# Altium PCB SchemaPCB_vova.PcbDoc
Units mm, origin at the board's own origin, x right, y up, seen from the top; angles counter-clockwise.
Board outline 152.4 x 101.6 mm, 2 copper layers (Top Layer, Bottom Layer); 76 components, 81 nets, 386 pads, 0 vias.
Unrouted connection lines stored in the file: 195.
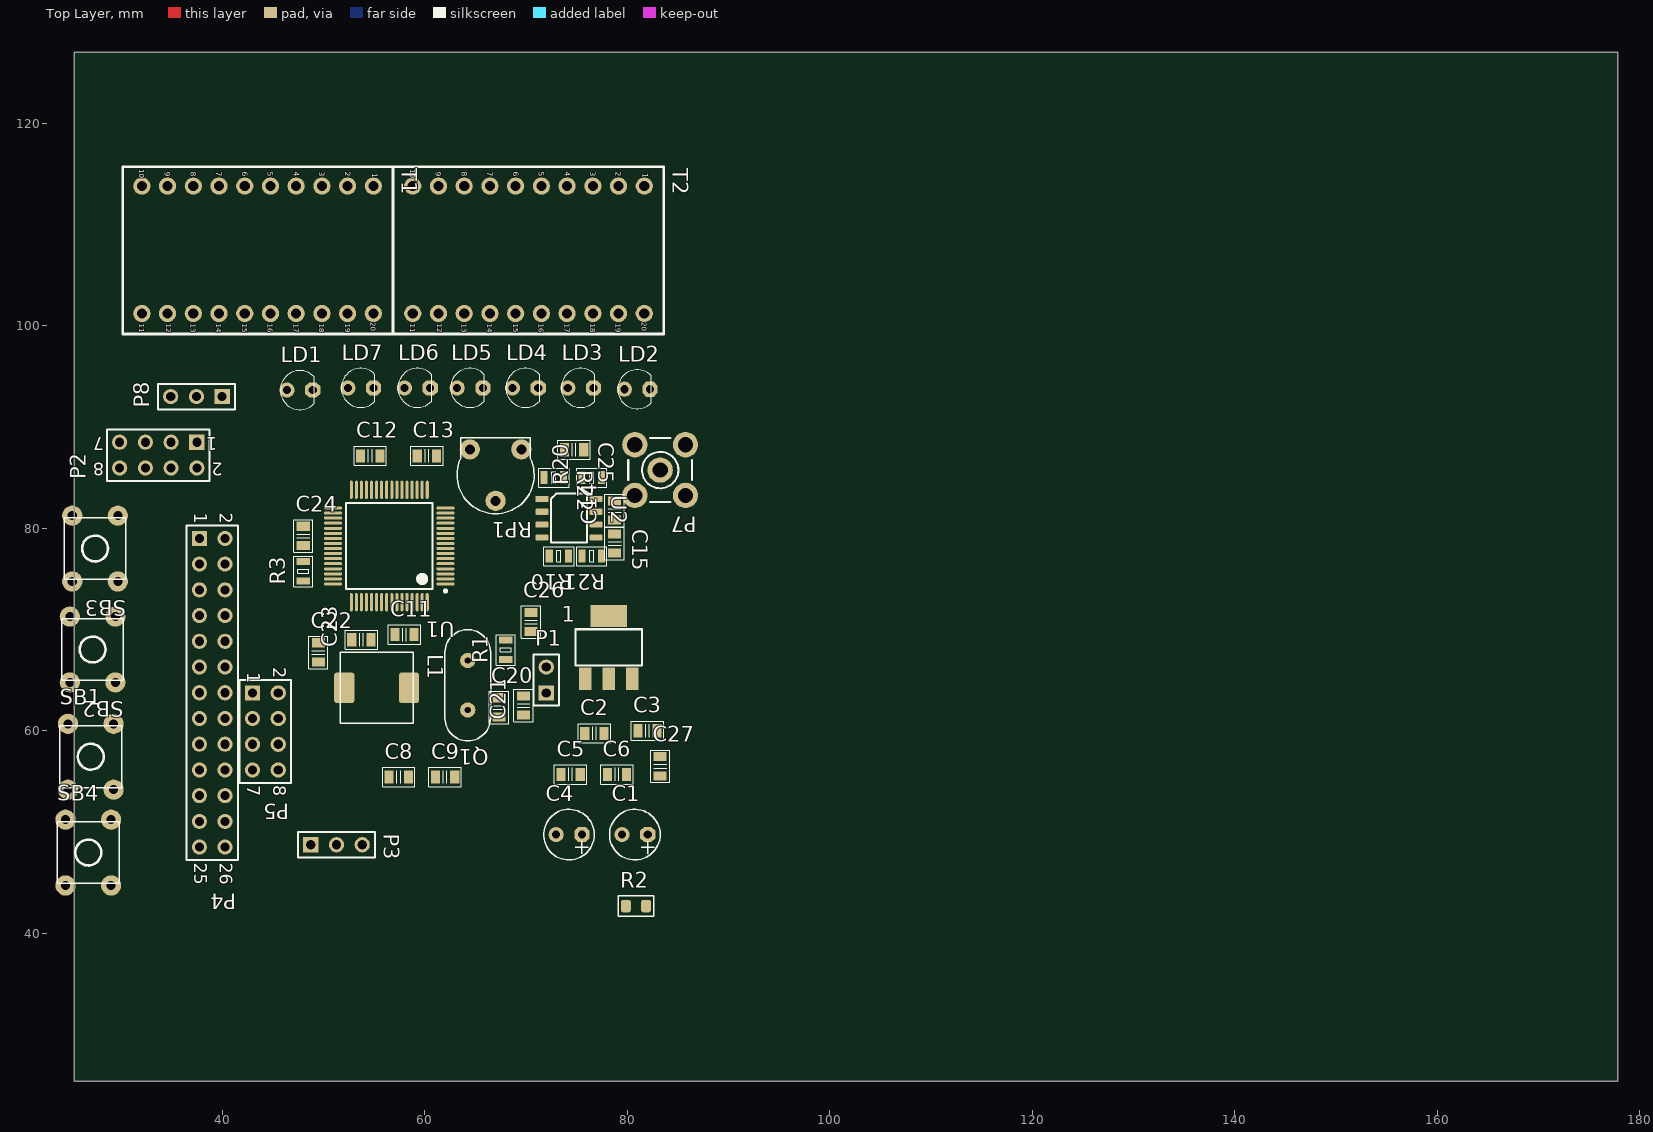
[diagram p0: Top Layer view]
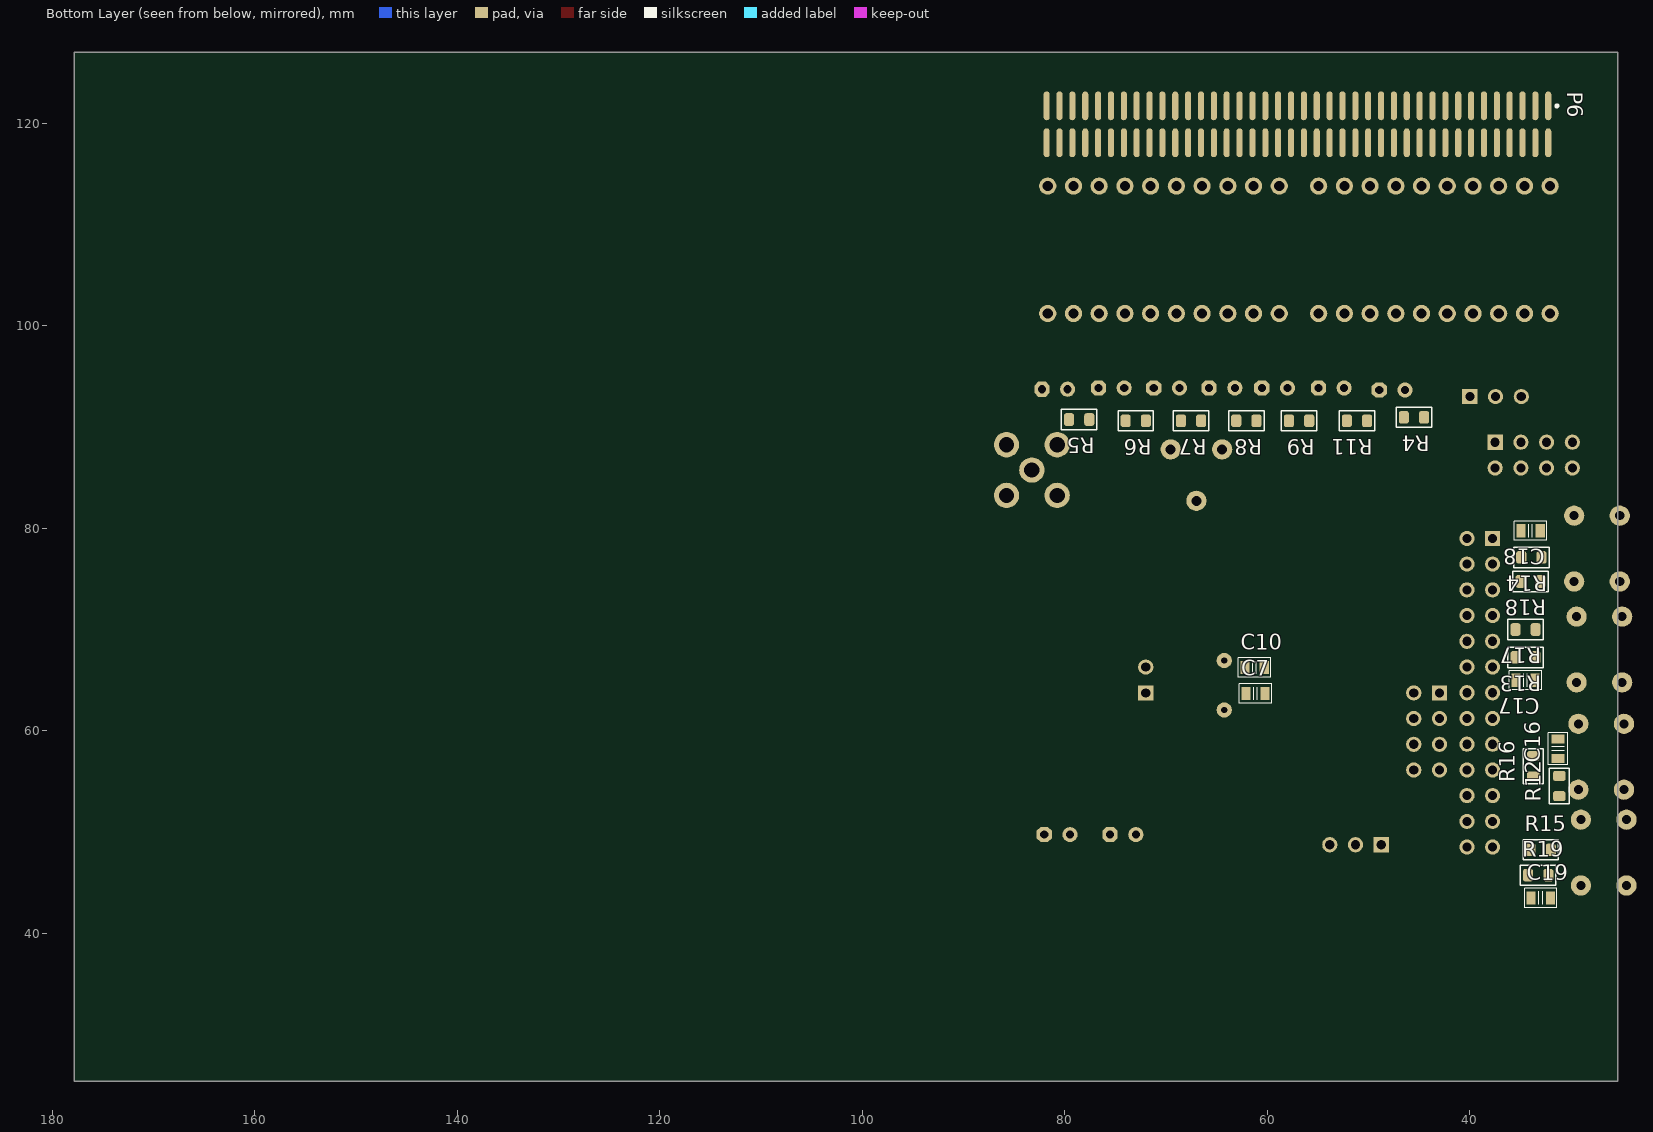
[diagram p1: Bottom Layer view, seen from below]

## Layer stack, top to bottom
Top Solder: solder mask 0.0102, Solder Resist, Dk 3.5
Top Layer: signal copper 0.0356
Dielectric 1: dielectric 0.32, FR-4, Dk 4.8
Bottom Layer: signal copper 0.0356
Bottom Solder: solder mask 0.0102, Solder Resist, Dk 3.5

## Board outline
25.4,25.4 177.8,25.4 177.8,127 25.4,127

## Design rules (kind name [scope] priority, off if disabled: settings)
Clearance [All] p1: gap=0.254
PolygonConnect [All] p1: connectstyle=Relief reliefconductorwidth=0.254 reliefentries=4 polygonreliefangle="90 Angle" airgapwidth=0.254
RoomDefinition Schema [InComponentClass('Schema')] p1: confinementstyle=ConfineIn formatcopy=TRUE lockcomponents=FALSE outline 178.856,25.36 651.804,25.36 651.804,79.843 178.856,79.843
RoutingVias [All] p1: holewidth=0.711 width=1.27 viastyle="Through Hole" minholewidth=0.711 minwidth=1.27 maxholewidth=0.711 maxwidth=1.27
SolderMaskExpansion [All] p1: expansion=0.102
Width [All] p1: maxlimit=0.254 minlimit=0.254 preferedwidth=0.254
29 further rules are at their usual default settings.

## Components (designator, comment, footprint, x,y, rotation, side; value= is the part's Value field where it differs from the comment)
1 "AMS1117-1.8" SOT-223_AMS1117-3.3(Primary) 78.25,68.25 r0 top
C1 "100u" El-d5-h11-F2.54 80.75,49.75 r0 top
C2 "100nF" C_0805 76.75,59.75 r0 top
C3 "100nF" C_0805 82,60 r0 top
C4 "100u" El-d5-h11-F2.54 74.25,49.75 r0 top
C5 "100nF" C_0805 74.409,55.699 r0 top
C6 "100nF" C_0805 78.981,55.699 r0 top
C7 "20pF" C_0805 61.165,63.69 r180 bottom
C8 "100nF" C_0805 57.441,55.44 r0 top
C9 "100nF" C_0805 62.013,55.44 r0 top
C10 "20pF" C_0805 61.25,66.25 r180 bottom
C11 "100nF" C_0805 58,69.5 r0 top
C12 "2.2uF" C_0805 54.623,87.151 r0 top
C13 "2.2uF" C_0805 60.211,87.151 r0 top
C14 "100nF" C_0805 78.75,81.75 r90 top
C15 "100nF" C_0805 78.75,78.5 r270 top
C16 "100nF" C_0805 31.297,58.233 r90 bottom
C17 "100nF" C_0805 34.5,65 r0 bottom
C18 "100nF" C_0805 34,79.75 r0 bottom
C19 "100nF" C_0805 33,43.5 r180 bottom
C20 "1uF" C_0805 67.342,62.321 r90 top
C21 "100nF" C_0805 69.75,62.5 r90 top
C22 "1uF" C_0805 49.5,67.75 r90 top
C23 "100nF" C_0805 53.75,69 r180 top
C24 "4.7uF" C_0805 48,79.25 r90 top
C25 "100nF" C_0805 74.75,87.75 r0 top
C26 "100nF" C_0805 70.5,70.75 r90 top
C27 "100nF" C_0805 83.25,56.5 r90 top
L1 "33u" Dr-SD-75 55.25,64.25 r270 top
LD1 "Led" "Led d3mm Blue" 47.673,93.646 r0 top
LD2 "Led" "Led d3mm Blue" 80.987,93.733 r0 top
LD3 "Led" "Led d3mm Blue" 75.399,93.86 r0 top
LD4 "Led" "Led d3mm Blue" 69.938,93.86 r0 top
LD5 "Led" "Led d3mm Blue" 64.477,93.86 r0 top
LD6 "Led" "Led d3mm Blue" 59.27,93.86 r0 top
LD7 "Led" "Led d3mm Blue" 53.682,93.86 r0 top
P1 "I2C2_ ControlWolf" HDR1X2 72,63.75 r90 top
P2 "HPower 4X2 5V,3V To DSP POWER" HDR2X4 37.5,88.5 r180 top
P3 "SWD" HDR1X3 48.75,48.75 r0 top
P4 "Header 13X2 ToWolf" HDR2X13 37.75,79 r270 top
P5 "Header 4X2 PogoWolf" HDR2X4 43,63.75 r270 top
P6 "1.27mm" 1.27mm-80p 57.023,119.888 r270 bottom
P7 "SMB" SMB_V-RJ45 83.25,85.75 r180 top
P8 "Header_GPIO_DSP" HDR1X3 40,93 r180 top
Q1 "8MHz" HC49S 64.25,64.5 r270 top
R1 "0" R_0805 68,68 r90 top
R2 "0k" R0805 80.859,42.693 r0 top
R3 "0" R_0805 48,75.75 r90 top
R4 "330" R0805 45.518,90.955 r0 bottom
R5 "330" R0805 78.578,90.741 r0 bottom
R6 "330" R0805 72.99,90.614 r0 bottom
R7 "330" R0805 67.529,90.614 r0 bottom
R8 "330" R0805 62.068,90.614 r0 bottom
R9 "330" R0805 56.861,90.614 r0 bottom
R10 "0" R_0805 73.25,77.25 r180 top
R11 "330" R0805 51.146,90.614 r0 bottom
R12 "30k" R0805 31.17,54.55 r90 bottom
R13 "30k" R0805 34.5,67.25 r0 bottom
R14 "30k" R0805 33.925,77.124 r0 bottom
R15 "30k" R0805 33,48.25 r180 bottom
R16 "100k" R0805 33.75,56.5 r90 bottom
R17 "100k" R0805 34.5,70 r0 bottom
R18 "100k" R0805 34,74.75 r0 bottom
R19 "100k" R0805 33.25,45.75 r180 bottom
R20 "0" R_0805 76.5,85 r180 top
R21 "0" R_0805 76.5,77.25 r180 top
R22 "0" R_0805 72.75,85 r0 top
RP1 "10k" "R-Tr 6LV" 67,85.25 r180 top
SB1 "TS-06" TS-06 27.029,57.443 r0 top
SB2 "TS-06" TS-06 27.209,68.03 r180 top
SB3 "TS-06" TS-06 27.451,77.997 r180 top
SB4 "TS-06" TS-06 26.783,47.981 r0 top
T1 "Logic Level Converter" TXS0108E 43.5,107.5 r270 top
T2 "Logic Level Converter" TXS0108E 70.25,107.5 r270 top
U1 "STM32F405RGT6" STM-LQFP64_N 56.5,78.25 r180 top
U2 "MCP6022" SO8-150 74.25,81 r270 top

## Footprints (in the part's own frame and the unit in brackets; to place one, negate y for a bottom-side part, rotate by r counter-clockwise, add the part's x,y. Pads: shape width x height; smd on the part's side, far side on the other; paste and mask are expansions set on the pad)
1.27mm-80p [mm] "80-Leads, Body 50,85x3,50mm, Pitch 1,27mm"
  oval 2.85x0.6 smd: 1(-1.825,24.765) 2(-1.825,23.495) 3(-1.825,22.225) 4(-1.825,20.955) 5(-1.825,19.685) 6(-1.825,18.415) 7(-1.825,17.145) 8(-1.825,15.875) 9(-1.825,14.605) 10(-1.825,13.335) 11(-1.825,12.065) 12(-1.825,10.795) 13(-1.825,9.525) 14(-1.825,8.255) 15(-1.825,6.985) 16(-1.825,5.715) 17(-1.825,4.445) 18(-1.825,3.175) 19(-1.825,1.905) 20(-1.825,0.635) 21(-1.825,-0.635) 22(-1.825,-1.905) 23(-1.825,-3.175) 24(-1.825,-4.445) 25(-1.825,-5.715) 26(-1.825,-6.985) 27(-1.825,-8.255) 28(-1.825,-9.525) 29(-1.825,-10.795) 30(-1.825,-12.065) 31(-1.825,-13.335) 32(-1.825,-14.605) 33(-1.825,-15.875) 34(-1.825,-17.145) 35(-1.825,-18.415) 36(-1.825,-19.685) 37(-1.825,-20.955) 38(-1.825,-22.225) 39(-1.825,-23.495) 40(-1.825,-24.765) 41(1.825,-24.765) 42(1.825,-23.495) 43(1.825,-22.225) 44(1.825,-20.955) 45(1.825,-19.685) 46(1.825,-18.415) 47(1.825,-17.145) 48(1.825,-15.875) 49(1.825,-14.605) 50(1.825,-13.335) 51(1.825,-12.065) 52(1.825,-10.795) 53(1.825,-9.525) 54(1.825,-8.255) 55(1.825,-6.985) 56(1.825,-5.715) 57(1.825,-4.445) 58(1.825,-3.175) 59(1.825,-1.905) 60(1.825,-0.635) 61(1.825,0.635) 62(1.825,1.905) 63(1.825,3.175) 64(1.825,4.445) 65(1.825,5.715) 66(1.825,6.985) 67(1.825,8.255) 68(1.825,9.525) 69(1.825,10.795) 70(1.825,12.065) 71(1.825,13.335) 72(1.825,14.605) 73(1.825,15.875) 74(1.825,17.145) 75(1.825,18.415) 76(1.825,19.685) 77(1.825,20.955) 78(1.825,22.225) 79(1.825,23.495) 80(1.825,24.765)
  silkscreen extent -1.95,25.49 -1.7,25.74, body extent -1.04,-25.7 2.56,25.2, height 6
C_0805 [mm] "Capacitor Pattern"
  rect 0.9x1.3 smd: 1(-0.95,0) 2(0.95,0)
  silkscreen extent -1.6,-0.95 1.6,0.95, body extent -1,-0.63 1,0.62, height 0.6
Dr-SD-75 [mm] "7.3x7.3x5mm"
  rrect25% 3x2 smd: 1(0,-3.2) 2(0,3.2)
  silkscreen extent -3.5,-3.6 3.5,3.6, body extent -3.5,-3.6 3.5,3.6, height 4.51
El-d5-h11-F2.54 [mm]
  oct 1.5x1.5 hole 0.8: 1(1.27,0)
  round 1.5 hole 0.8: 2(-1.27,0)
  silkscreen extent -2.5,-2.5 2.5,2.5, body extent -2.5,-2.5 2.55,2.55, height 11.53
HC49S [mm]
  round 1.5 hole 0.6: 1(-2.44,0) 2(2.44,0)
  silkscreen extent -5.5,-2.25 5.5,2.25, body extent -5.5,-2.25 5.5,2.25, height 3.7
HDR1X2 [mm] "Connector; Header; 2 Position"
  rect 1.5x1.5 hole 0.9: 1(0,0)
  round 1.5 hole 0.9: 2(2.54,0)
  silkscreen extent -1.27,-1.27 3.81,1.27
HDR1X3 [mm] "Connector; Header; 3 Position"
  rect 1.5x1.5 hole 0.9: 1(0,0)
  round 1.5 hole 0.9: 2(2.54,0) 3(5.08,0)
  silkscreen extent -1.27,-1.27 6.35,1.27
HDR2X4 [mm] "Connector; Header; 4x2 Position"
  rect 1.5x1.5 hole 0.9: 1(0,0)
  round 1.5 hole 0.9: 2(0,2.54) 3(2.54,0) 4(2.54,2.54) 5(5.08,0) 6(5.08,2.54) 7(7.62,0) 8(7.62,2.54)
  silkscreen extent -1.27,-1.27 8.89,3.81
HDR2X13 [mm] "Connector; Header; 13x2 Position"
  rect 1.5x1.5 hole 0.9: 1(0,0)
  round 1.5 hole 0.9: 2(0,2.54) 3(2.54,0) 4(2.54,2.54) 5(5.08,0) 6(5.08,2.54) 7(7.62,0) 8(7.62,2.54) 9(10.16,0) 10(10.16,2.54) 11(12.7,0) 12(12.7,2.54) 13(15.24,0) 14(15.24,2.54) 15(17.78,0) 16(17.78,2.54) 17(20.32,0) 18(20.32,2.54) 19(22.86,0) 20(22.86,2.54) 21(25.4,0) 22(25.4,2.54) 23(27.94,0) 24(27.94,2.54) 25(30.48,0) 26(30.48,2.54)
  silkscreen extent -1.27,-1.27 31.75,3.81
"Led d3mm Blue" [mm]
  round 1.5 hole 0.8: 1(-1.27,0)
  oct 1.5x1.5 hole 0.8: 2(1.27,0)
  silkscreen extent -1.92,-1.92 1.4,1.92, body extent -1.57,-1.55 1.57,1.55, height 7.36
R0805 [mm]
  rrect50% 1x1.25 smd: 1(-1,0) 2(1,0)
  silkscreen extent -1.75,-1 1.75,1, body extent -1,-0.62 1,0.63, height 0.6
"R-Tr 6LV" [mm]
  round 2 hole 1: 1(-2.54,-2.54) 2(0,2.54) 3(2.54,-2.54)
  silkscreen extent -3.81,-3.68 3.81,3.81, body extent -3.3,-3.3 3.3,3.3, height 4.74
R_0805 [mm] "Resistor Pattern"
  rect 0.7x1.3 smd: 1(-0.95,0) 2(0.95,0)
  silkscreen extent -1.5,-0.95 1.5,0.95, body extent -1,-0.6 1,0.6, height 0.5
SMB_V-RJ45 [mm] "Connector; SMB Straight"
  round 2.5 hole 1.5: 1(0,0) 2(-2.5,2.5) 2(-2.5,-2.5) 2(2.5,2.5) 2(2.5,-2.5)
  silkscreen extent -3.15,-3.15 3.15,3.15
SO8-150 [mil]
  rect 24x50 smd mask+4: 1(-75,-105)
  rrect50% 24x52 smd mask+4: 2(-25,-105) 3(25,-105) 4(75,-105) 5(75,105) 6(25,105) 7(-25,105) 8(-75,105)
  silkscreen extent -95,-70 95,70, body extent -95,-122 95,122, height 67
SOT-223_AMS1117-3.3(Primary) [mm]
  rect 1.219x2.235 smd paste-25.4 mask-25.4: 1(-2.381,-3.099) 2(-0.07,-3.099) 3(2.241,-3.099)
  rect 3.6x2.2 smd paste-25.4 mask-25.4: 2(-0.07,3.099)
  silkscreen extent -3.35,-1.78 3.21,1.78
STM-LQFP64_N [mm] "Thin QFP, 64-Leads, Body 10x10mm, Pitch 0.5mm, IPC Medium Density"
  oval 1.8x0.3 smd: 1(-5.55,3.75) 2(-5.55,3.25) 3(-5.55,2.75) 4(-5.55,2.25) 5(-5.55,1.75) 6(-5.55,1.25) 7(-5.55,0.75) 8(-5.55,0.25) 9(-5.55,-0.25) 10(-5.55,-0.75) 11(-5.55,-1.25) 12(-5.55,-1.75) 13(-5.55,-2.25) 14(-5.55,-2.75) 15(-5.55,-3.25) 16(-5.55,-3.75) 33(5.55,-3.75) 34(5.55,-3.25) 35(5.55,-2.75) 36(5.55,-2.25) 37(5.55,-1.75) 38(5.55,-1.25) 39(5.55,-0.75) 40(5.55,-0.25) 41(5.55,0.25) 42(5.55,0.75) 43(5.55,1.25) 44(5.55,1.75) 45(5.55,2.25) 46(5.55,2.75) 47(5.55,3.25) 48(5.55,3.75)
  oval 0.3x1.8 smd: 17(-3.75,-5.55) 18(-3.25,-5.55) 19(-2.75,-5.55) 20(-2.25,-5.55) 21(-1.75,-5.55) 22(-1.25,-5.55) 23(-0.75,-5.55) 24(-0.25,-5.55) 25(0.25,-5.55) 26(0.75,-5.55) 27(1.25,-5.55) 28(1.75,-5.55) 29(2.25,-5.55) 30(2.75,-5.55) 31(3.25,-5.55) 32(3.75,-5.55) 49(3.75,5.55) 50(3.25,5.55) 51(2.75,5.55) 52(2.25,5.55) 53(1.75,5.55) 54(1.25,5.55) 55(0.75,5.55) 56(0.25,5.55) 57(-0.25,5.55) 58(-0.75,5.55) 59(-1.25,5.55) 60(-1.75,5.55) 61(-2.25,5.55) 62(-2.75,5.55) 63(-3.25,5.55) 64(-3.75,5.55)
  silkscreen extent -5.68,-4.25 4.25,4.57, body extent -5,-5 5,5, height 1.6
TS-06 [mm]
  round 2 hole 0.9: 1(-2.25,-3.25) 1(-2.25,3.25) 2(2.25,-3.25) 2(2.25,3.25)
  silkscreen extent -3.05,-3.05 3.05,3.05, body extent -3,-3.3 3,3.3, height 3.95
TXS0108E [mm]
  round 1.7 hole 1: 1(-6.287,11.43) 2(-6.287,8.89) 3(-6.287,6.35) 4(-6.287,3.81) 5(-6.286,1.27) 6(-6.286,-1.27) 7(-6.286,-3.81) 8(-6.286,-6.35) 9(-6.286,-8.89) 10(-6.286,-11.43) 11(6.286,-11.43) 12(6.286,-8.89) 13(6.286,-6.35) 14(6.286,-3.81) 15(6.286,-1.27) 16(6.286,1.27) 17(6.286,3.81) 18(6.286,6.35) 19(6.286,8.89) 20(6.286,11.43)
  silkscreen extent -8.19,-13.34 8.32,13.33

## Part data
1: library part AMS1117-3.3
C1 C4: library part 10u-35V, "35V"
C2 C3 C5 C6 C7 C8 C9 C10 C11 C12 C13 C14 C15 C16 C17 C18 C19 C20 C21 C22 C23 C24 C25 C26 C27: library part C0805, "Capacitor"
L1: library part "L-SD-75 33uH", "1.2A 0.15om 7.3x7.3x5mm"
LD1 LD2 LD3 LD4 LD5 LD6 LD7: library part "Led 3mm Blue", "3mm"
P1: library part "Header 2", "Header, 2-Pin"
P2 P5: library part "Header 4X2", "Header, 4-Pin, Dual row"
P3 P8: library part "Header 3", "Header, 3-Pin"
P4: library part "Header 13X2", "Header, 13-Pin, Dual row"
P6: library part "1.27mm Header"
P7: "SMB Straight Connector"
Q1: library part Q
R1 R3 R10 R20 R21 R22: library part R0805, "Resistor"
R2 R4 R5 R6 R7 R8 R9 R11 R12 R13 R14 R15 R16 R17 R18 R19: library part R-0805, "SMD 0805 0.1W 5% 150V"
RP1: library part "R-Tr 6LV", "Тример 0,15W 6mm Вер. Piner"
SB1 SB2 SB3 SB4: library part "Buton TS-06"
T1 T2: library part TXS0108E
U1: "ARM Cortex-M4 32-bit MCU+FPU, 210 DMIPS, 1024 kB Flash, 192 kB Internal RAM, 51 I/Os, 64-pin LQFP, -40 to 85 degC, Tray"
U2: library part MCP6072, "CMOS 0.15mV 1.2MHz R/R In/Out 110uA"

## Nets (pads, with @x,y where several pads share a name; then routed paths per layer and width w, separated by ;. In a path a pad name is that pad's centre, name@x,y a point inside that pad or via, vN(x,y) a via of type N, cw(c..) or ccw(c..) an arc to the next point about the centre after c; other vN are vias at no path point)
ADC: RP1.3 U1.14 U2.7
BCLK: P5.4 U1.34
DSP_BTN1: C18.2 R14.2 R18.1 T2.15
DSP_BTN2: C19.2 R15.2 R19.1 T2.14
DSP_GPIO0: T1.15 U1.38
DSP_GPIO1: LD2.2 T1.12
DSP_GPIO2: LD3.2 T2.19
DSP_GPIO3: LD4.2 T2.18
DSP_GPIO4: LD1.2 T2.17
DSP_GPIO5: P8.1 T2.16
DSP_GPIOIN0: P6.50 T1.6
DSP_GPIOIN1: P6.52 T1.9
DSP_GPIOIN2: P6.54 T2.2
DSP_GPIOIN3: P6.56 T2.3
DSP_GPIOIN4: P6.58 T2.4
DSP_GPIOIN5: P6.60 T2.5
DSP_GPIOIN6: P6.62 T2.6
DSP_GPIOIN7: P6.64 T2.7
DSP_I2C_CLK: T1.14 U1.58
DSP_I2C_CLK_IN: P6.5 T1.7
DSP_I2C_SDA: T1.13 U1.59
DSP_I2C_SDA_IN: P6.3 T1.8
DSP_MISO: T1.18 U1.22
DSP_MISO_IN: P6.63 T1.3
DSP_MOSI: T1.17 U1.23
DSP_MOSI_IN: P6.65 T1.4
DSP_NSS: R2.1 T1.16
DSP_NSS_IN: P6.67 T1.5
DSP_SCK: T1.19 U1.21
DSP_SCK_IN: P6.69 T1.2
DSP_TIM_I: P6.59 T2.8
DSP_TIM_O: P6.61 T2.9
DSP_TIMI: P8.2 T2.13
DSP_TIMO: P8.3 T2.12
GND: 1.1 C1.2 C2.1 C3.1 C4.2 C5.1 C6.2 C7.1 C8.1 C9.2 C10.1 C11.1 C12.1 C13.1 C14.1 C16.1 C17.1 C18.1 C19.1 C20.2 C21.2 C22.1 C23.1 C24.1 C25.1 C26.1 C27.1 P2.4 P2.7 P2.8 P3.1 P4.6 P4.9 P4.14 P4.20 P4.25 P5.7 P5.8 P7.2 R1.1 R3.1 R16.2 R17.2 R18.2 R19.2 R21.1 T1.11 T2.11 U1.12 U1.18 U1.63 U2.4
I2C2_CLK: P1.1 U1.29
I2C2_SDA: P1.2 U1.30
KNOPKA1: C17.2 R13.2 R17.1 U1.37
KNOPKA2: C16.2 R12.2 R16.1 U1.25
LED1: LD5.2 U1.43
LED2: LD6.2 U1.44
LED3: LD7.2 U1.45
LRCLK: P5.3 U1.33
NetC7_2: C7.2 Q1.1 U1.5
NetC10_2: C10.2 Q1.2 U1.6
NetC11_2: C11.2 U1.7
NetC12_2: C12.2 U1.47
NetC13_2: C13.2 U1.31
NetC14_2: C14.2 R10.2 U2.5
NetC15_1: C15.1 P7.1
NetC15_2: C15.2 R10.1
NetC22_2: C22.2 C23.2 L1.2 U1.13
NetLD1_1: LD1.1 R4.2
NetLD2_1: LD2.1 R5.2
NetLD3_1: LD3.1 R6.2
NetLD4_1: LD4.1 R7.2
NetLD5_1: LD5.1 R8.2
NetLD6_1: LD6.1 R9.2
NetLD7_1: LD7.1 R11.2
NetR1_2: R1.2 U1.28
NetR2_2: R2.2 U1.20
NetR3_2: R3.2 U1.60
NetR12_1: R12.1 SB1.2
NetR13_1: R13.1 SB2.2
NetR14_1: R14.1 SB3.2
NetR15_1: R15.1 SB4.2
NetR20_2: R20.2 R21.2 U2.3
NetR22_1: R22.1 U2.1 U2.2
NetR22_2: R22.2 RP1.1 RP1.2 U2.6
RXDAT: P5.5 U1.10
SCLK_SDIF: P4.5 U1.41
SDA_SDIF: P4.3 U1.42
SPI_MISO: P4.21 U1.52
SPI_MOSI: P4.19 U1.53
SPI_SCLK: P4.23 U1.51
SWCLK: P3.3 U1.49
SWDAT: P3.2 U1.46
TXDAT: P5.6 U1.11
"VCC 1.8V": 1.2 C1.1 C3.2 C5.2 C8.2 T1.1 T1.10 T2.1 T2.10
"VCC 3.3V": C6.1 C9.1 C20.1 C21.1 C24.2 C25.2 C26.2 C27.2 L1.1 P2.5 P2.6 P4.1 P4.17 P5.2 R4.1 R5.1 R6.1 R7.1 R8.1 R9.1 R11.1 R20.1 SB1.1 SB2.1 SB3.1 SB4.1 T1.20 T2.20 U1.1 U1.19 U1.32 U1.48 U1.64 U2.8
"VCC 5V": 1.3 C2.2 C4.1 P2.1 P2.2
pads on no net: P2.3 P4.2 P4.4 P4.7 P4.8 P4.10 P4.11 P4.12 P4.13 P4.15 P4.16 P4.18 P4.22 P4.24 P4.26 P5.1 P6.1 P6.2 P6.4 P6.6 P6.7 P6.8 P6.9 P6.10 P6.11 P6.12 P6.13 P6.14 P6.15 P6.16 P6.17 P6.18 P6.19 P6.20 P6.21 P6.22 P6.23 P6.24 P6.25 P6.26 P6.27 P6.28 P6.29 P6.30 P6.31 P6.32 P6.33 P6.34 P6.35 P6.36 P6.37 P6.38 P6.39 P6.40 P6.41 P6.42 P6.43 P6.44 P6.45 P6.46 P6.47 P6.48 P6.49 P6.51 P6.53 P6.55 P6.57 P6.66 P6.68 P6.70 P6.71 P6.72 P6.73 P6.74 P6.75 P6.76 P6.77 P6.78 P6.79 P6.80 U1.2 U1.3 U1.4 U1.8 U1.9 U1.15 U1.16 U1.17 U1.24 U1.26 U1.27 U1.35 U1.36 U1.39 U1.40 U1.50 U1.54 U1.55 U1.56 U1.57 U1.61 U1.62
copper on no net: | length 309
  Top Layer w0.254: 808,1701 1117,1701

## Text inside footprints (layer, text, board x,y; h text height)
P2: Top Overlay "2" at 40.04,86.468 h1.27 r180; Top Overlay "1" at 39.532,89.008 h1.27 r180; Top Overlay "7" at 28.356,89.008 h1.27 r180; Top Overlay "8" at 28.356,86.468 h1.27 r180
P4: Top Overlay "2" at 39.782,81.54 h1.27 r270; Top Overlay "1" at 37.242,81.54 h1.27 r270; Top Overlay "25" at 37.242,46.996 h1.27 r270; Top Overlay "26" at 39.782,46.996 h1.27 r270
P5: Top Overlay "2" at 45.032,66.29 h1.27 r270; Top Overlay "1" at 42.492,65.782 h1.27 r270; Top Overlay "7" at 42.492,54.606 h1.27 r270; Top Overlay "8" at 45.032,54.606 h1.27 r270
T1: Top Overlay "1" at 54.803,115.057 h0.52 r270; Top Overlay "2" at 52.136,115.184 h0.52 r270; Top Overlay "3" at 49.596,115.184 h0.52 r270; Top Overlay "4" at 47.056,115.184 h0.52 r270; Top Overlay "5" at 44.516,115.184 h0.52 r270; Top Overlay "6" at 41.976,115.184 h0.52 r270; Top Overlay "7" at 39.436,115.184 h0.52 r270; Top Overlay "8" at 36.896,115.184 h0.52 r270; Top Overlay "9" at 34.356,115.184 h0.52 r270; Top Overlay "10" at 31.816,115.438 h0.5 r270; Top Overlay "11" at 31.816,100.198 h0.5 r270; Top Overlay "12" at 34.483,100.198 h0.5 r270; Top Overlay "13" at 36.896,100.198 h0.5 r270; Top Overlay "14" at 39.436,100.198 h0.5 r270; Top Overlay "15" at 41.976,100.198 h0.5 r270; Top Overlay "16" at 44.516,100.198 h0.5 r270; Top Overlay "17" at 47.056,100.198 h0.5 r270; Top Overlay "18" at 49.596,100.198 h0.5 r270; Top Overlay "19" at 52.136,100.198 h0.5 r270; Top Overlay "20" at 54.676,100.325 h0.5 r270
T2: Top Overlay "1" at 81.553,115.057 h0.52 r270; Top Overlay "2" at 78.886,115.184 h0.52 r270; Top Overlay "3" at 76.346,115.184 h0.52 r270; Top Overlay "4" at 73.806,115.184 h0.52 r270; Top Overlay "5" at 71.266,115.184 h0.52 r270; Top Overlay "6" at 68.726,115.184 h0.52 r270; Top Overlay "7" at 66.186,115.184 h0.52 r270; Top Overlay "8" at 63.646,115.184 h0.52 r270; Top Overlay "9" at 61.106,115.184 h0.52 r270; Top Overlay "10" at 58.566,115.438 h0.5 r270; Top Overlay "11" at 58.566,100.198 h0.5 r270; Top Overlay "12" at 61.233,100.198 h0.5 r270; Top Overlay "13" at 63.646,100.198 h0.5 r270; Top Overlay "14" at 66.186,100.198 h0.5 r270; Top Overlay "15" at 68.726,100.198 h0.5 r270; Top Overlay "16" at 71.266,100.198 h0.5 r270; Top Overlay "17" at 73.806,100.198 h0.5 r270; Top Overlay "18" at 76.346,100.198 h0.5 r270; Top Overlay "19" at 78.886,100.198 h0.5 r270; Top Overlay "20" at 81.426,100.325 h0.5 r270